# Altium PCB dc_cdi.PcbDoc (part 1 of 3)
Units mm, origin at the board's own origin, x right, y up, seen from the top; angles counter-clockwise.
Board outline 67 x 85 mm, 4 copper layers (Signal Top, Gnd, Power, Signal Bottom), stack 0.603 mm thick; 104 components, 72 nets, 386 pads, 139 vias.
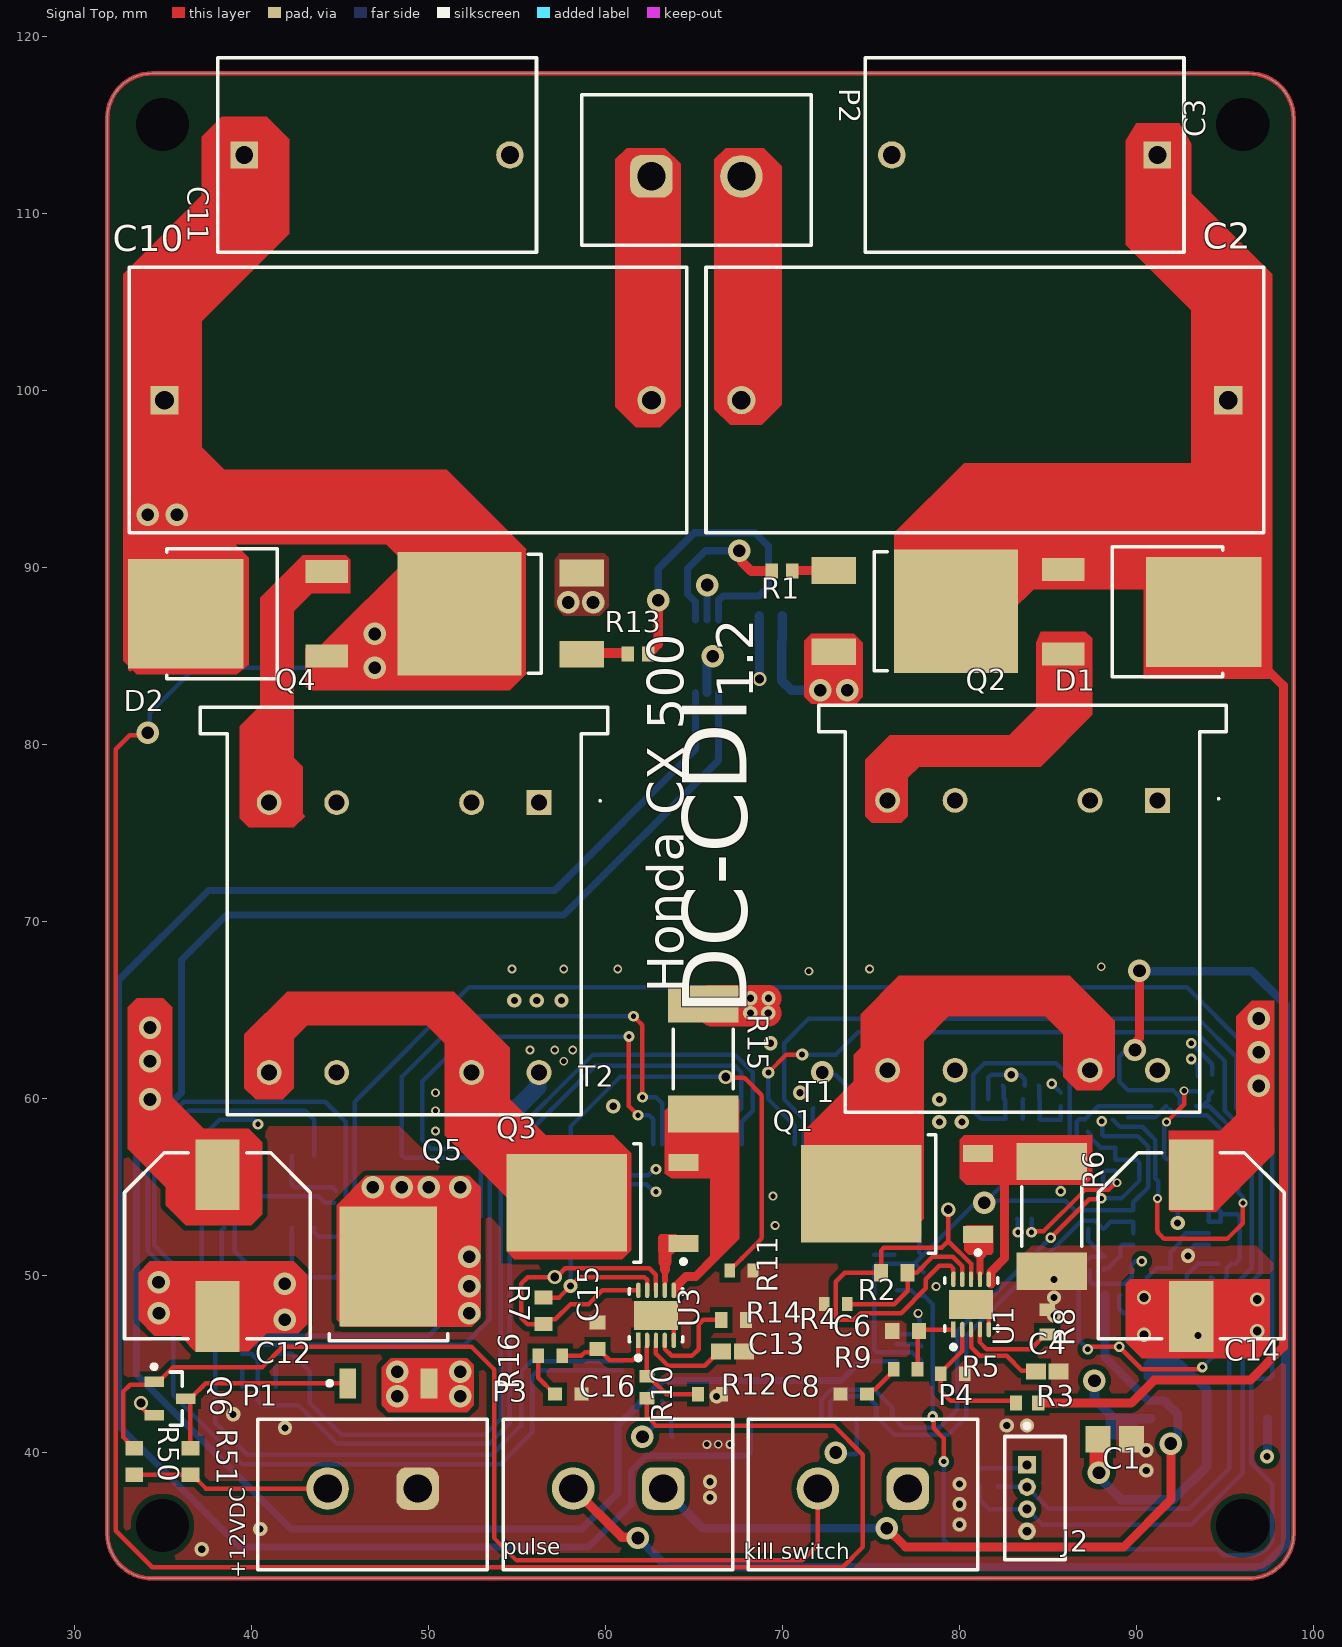
[diagram p0: Signal Top view]
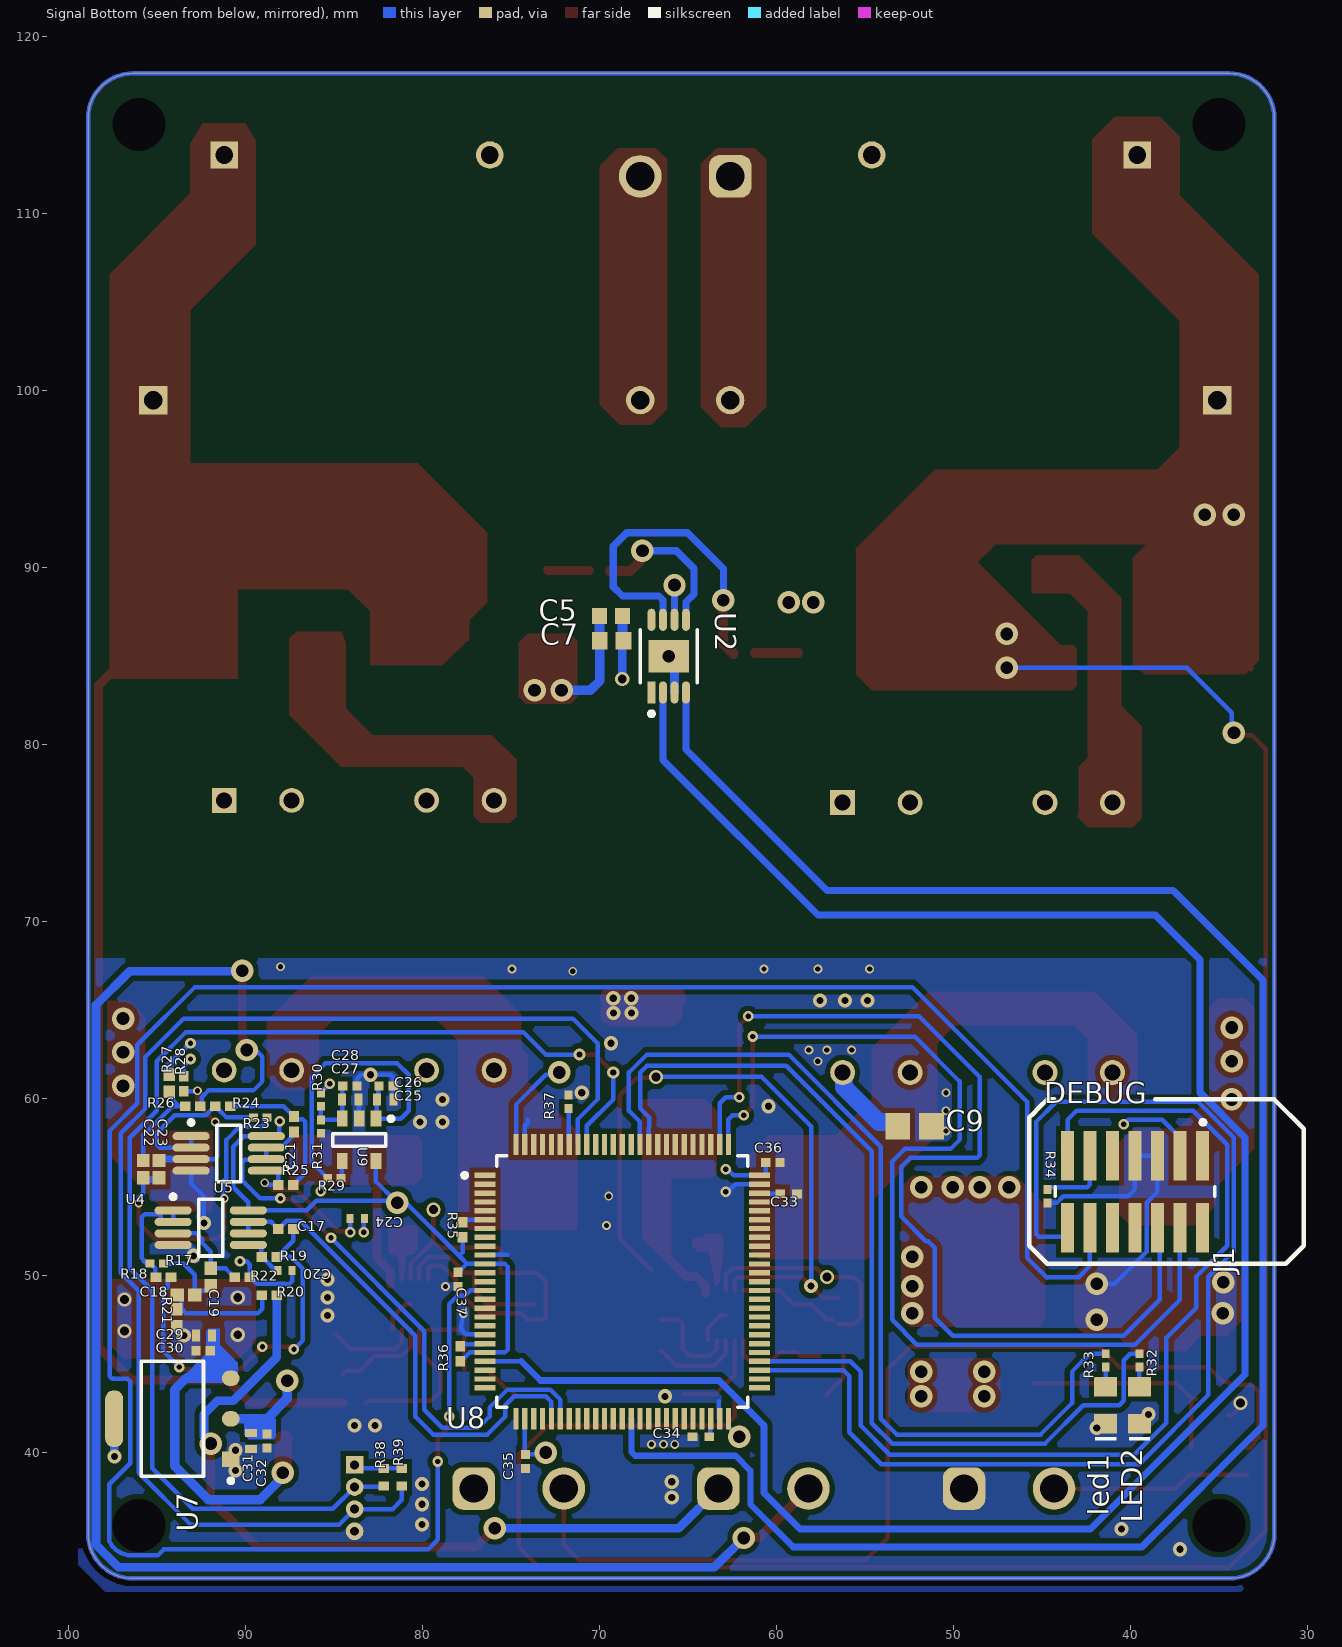
[diagram p1: Signal Bottom view, seen from below]
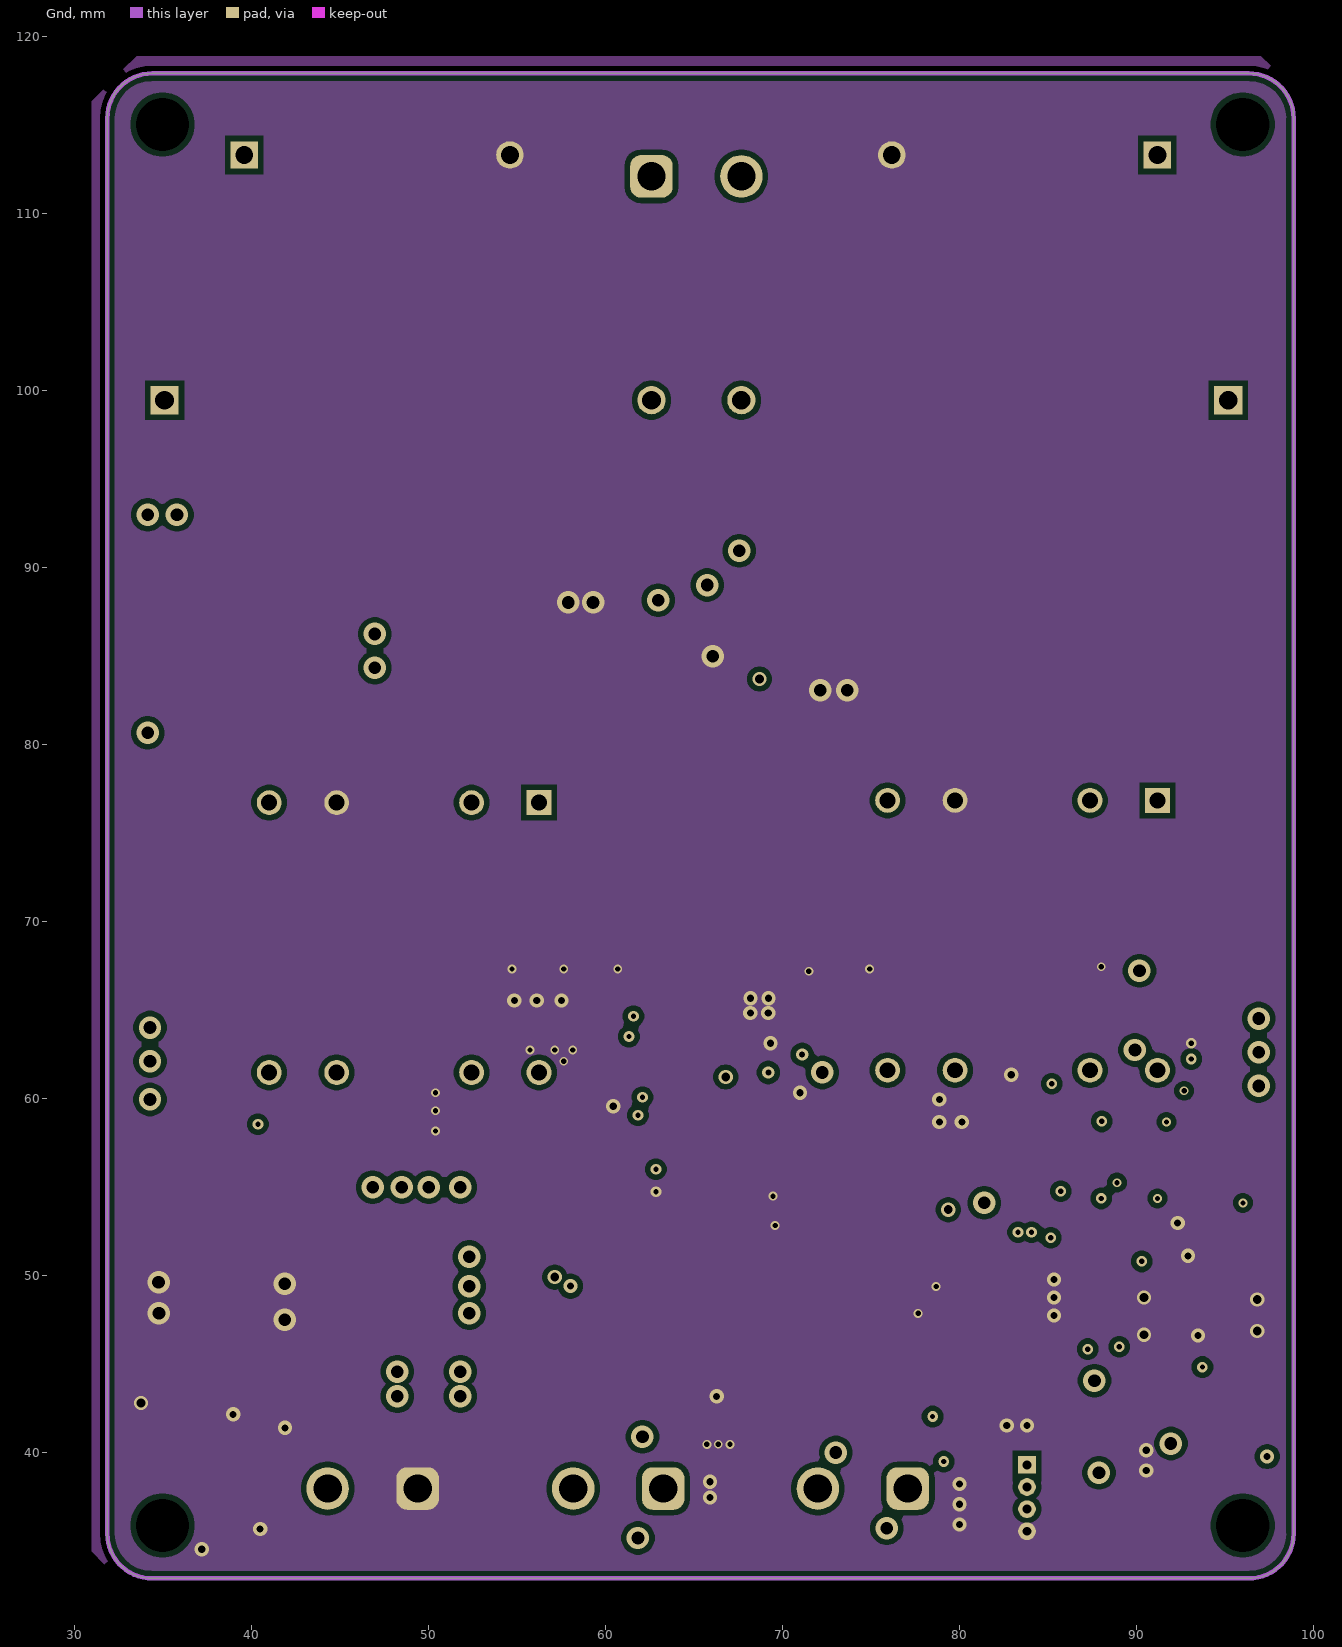
[diagram p2: Gnd]
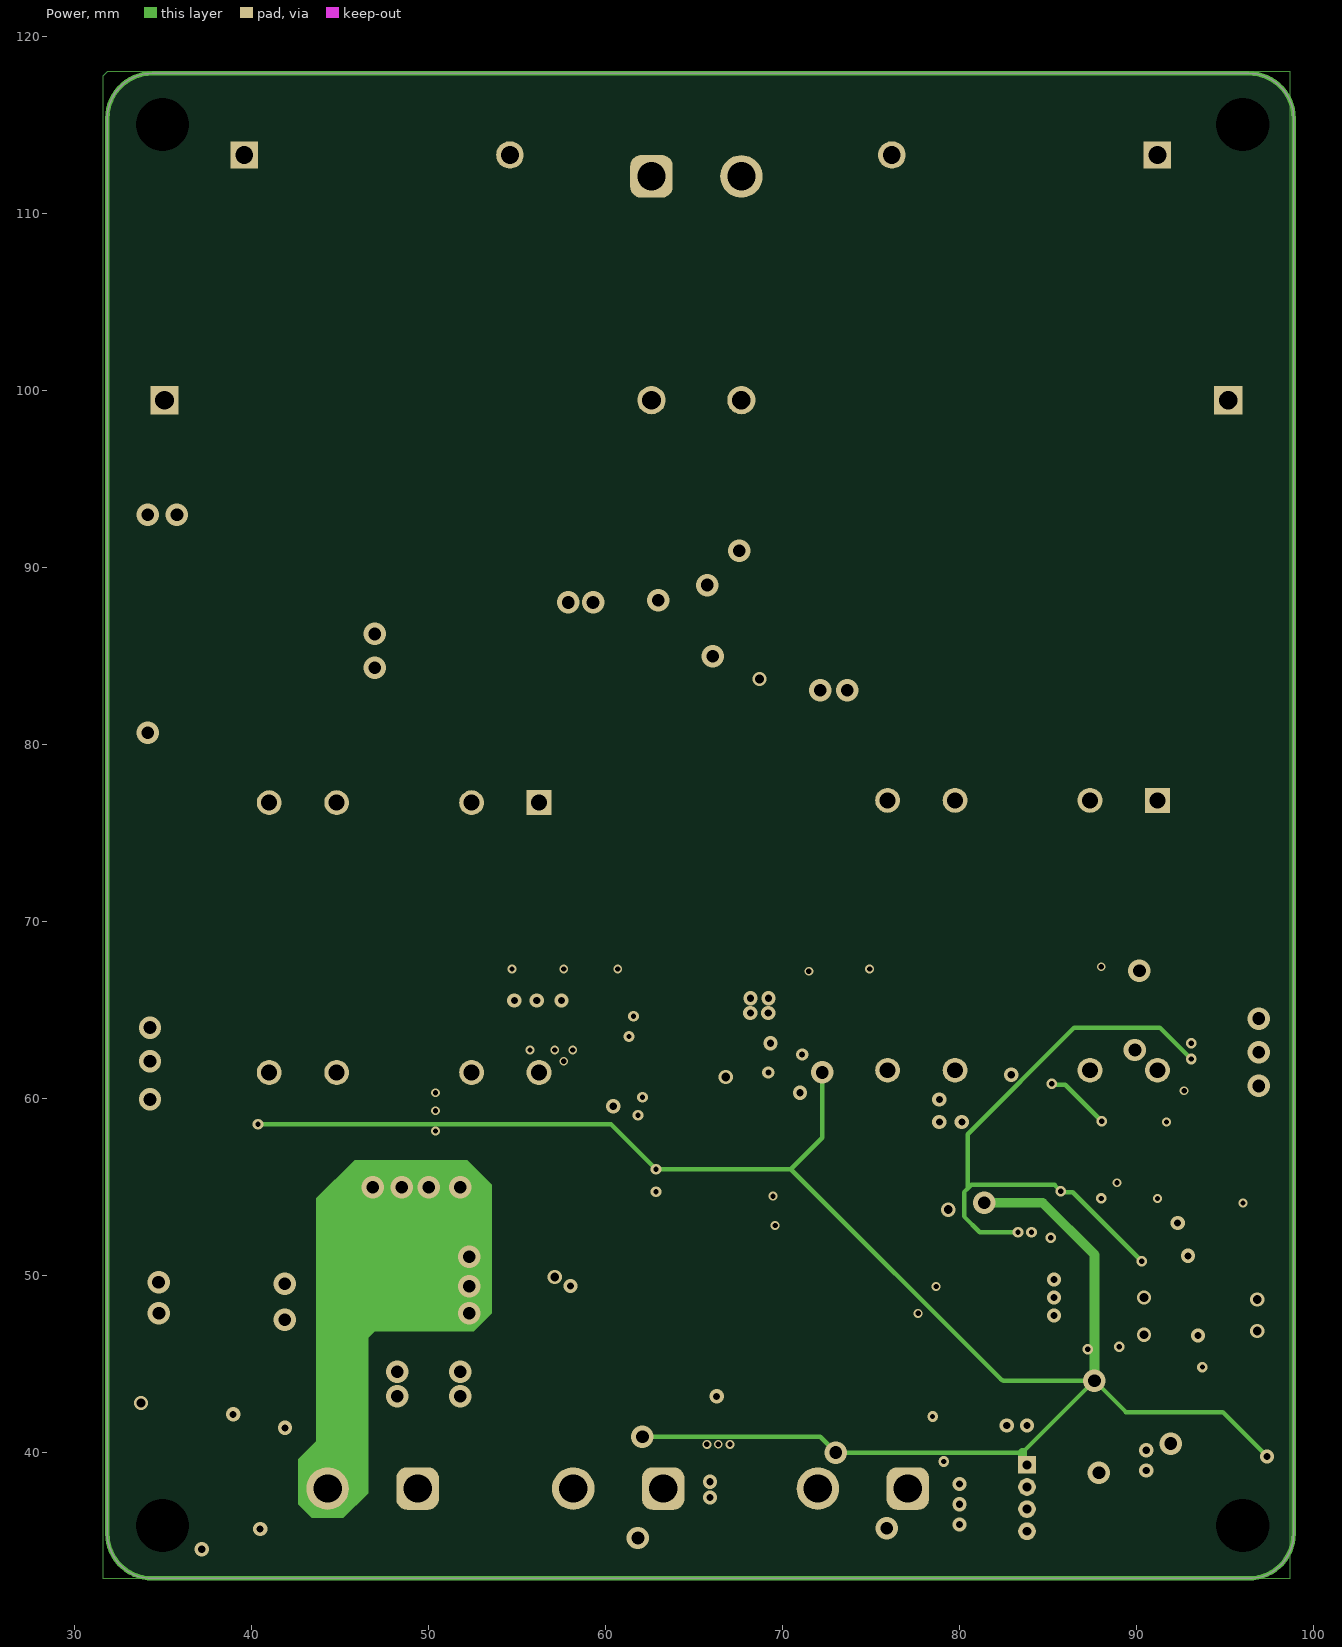
[diagram p3: Power]
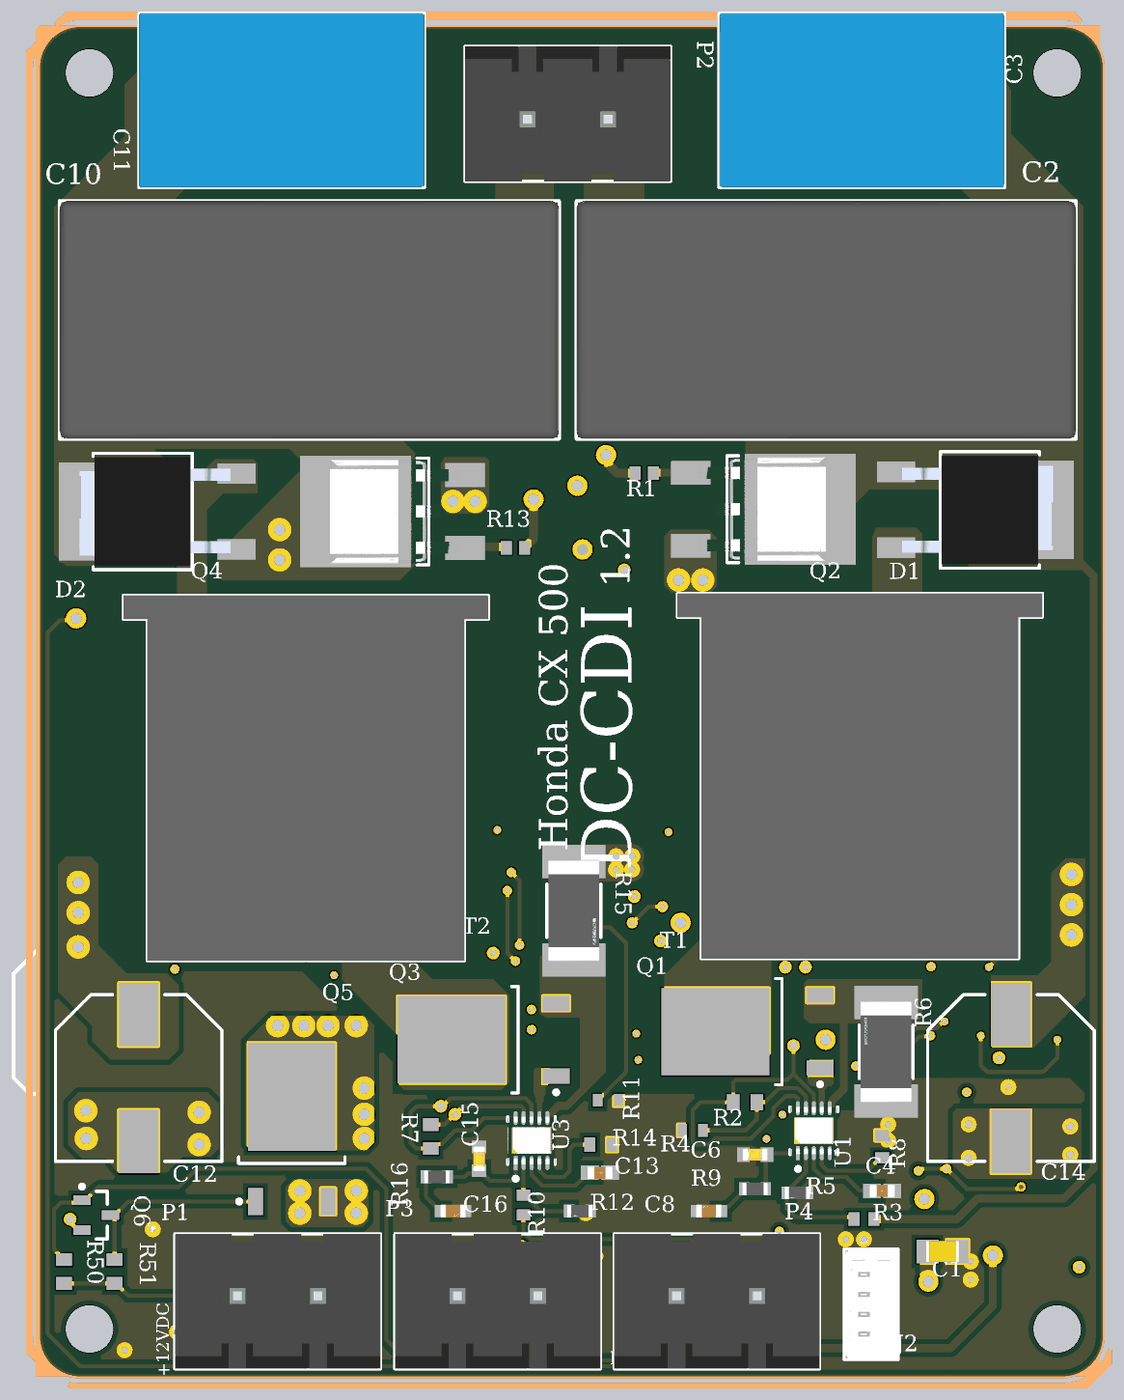
[diagram p5: 3D render of the assembled board from above, using the file's embedded part models]

## Layer stack, top to bottom
Top Solder: solder mask 0.0102, Solder Resist, Dk 3.5
Signal Top: signal copper 0.035
Dielectric 2: prepreg 0.0711, PP-006, Dk 4.1
Gnd: signal copper 0.0356
Dielectric 1: dielectric 0.32, FR-4, Dk 4.8
Power: signal copper 0.0356
Dielectric 3: prepreg 0.0711, PP-006, Dk 4.1
Signal Bottom: signal copper 0.035
Bottom Solder: solder mask 0.0102, Solder Resist, Dk 3.5

## Board outline
31.877,35.433 31.877,115.353 cw(c34.417,115.353) 34.417,117.893 96.337,117.893 cw(c96.337,115.353) 98.877,115.353 98.877,35.433 cw(c96.337,35.433) 96.337,32.893 34.417,32.893 cw(c34.417,35.433)

## Design rules (kind name [scope] priority, off if disabled: settings)
Clearance [All] p1: gap=0.3 ignorepadtopadclearanceinfootprint=FALSE
ComponentClearance [All] p1 off: gap=0 collisioncheckmode=3 verticalgap=0 showdistances=FALSE
Height [All] p1 off: minheight=0 maxheight=25.4 prefheight=12.7
PlaneClearance [All] p1: clearance=15
PolygonConnect [All] p1: connectstyle=Direct reliefconductorwidth=0.254 reliefentries=4 polygonreliefangle="90 Angle" airgapwidth=0.254
RoutingVias [All] p1: holewidth=0.711 width=1.27 viastyle="Through Hole" minholewidth=0.711 minwidth=1.27 maxholewidth=0.711 maxwidth=1.27
SolderMaskExpansion [All] p1: expansion=0.102 istentingtop=FALSE
SupplyNets "Schematic Supply Nets_5" [InNet('GND')] p1: voltage=0.000
SupplyNets "Schematic Supply Nets_4" [InNet('+12')] p2: voltage=0.000
SupplyNets "Schematic Supply Nets_3" [InNet('+3V3')] p3: voltage=0.000
SupplyNets "Schematic Supply Nets_2" [InNet('+12FIX')] p4: voltage=0.000
SupplyNets "Schematic Supply Nets_1" [InNet('VREF')] p5: voltage=0.000
Width [All] p1: maxlimit=0.254 minlimit=0.254 preferedwidth=0.254
27 further rules are at their usual default settings.

## Classes and differential pairs
component class power_side: C1 C2 C3 C4 C5 C6 C7 C8 C9 C10 C11 C13 C15 C16 D1 D2 Q1 Q2 Q3 Q4 R1 R2 R3 R4 R5 R6 R7 R8 R9 R10 R11 R12 R13 R14 R15 R16 T1 T2 U1 U2 U3
component class logic_000: C29 C30 C31 C32 C33 C34 C35 C37 J1 led1 LED2 R32 R33 R34 R35 R36 R37 R38 R39 U7 U8
component class input_output: C12 C14 J2 P1 P2 P3 P4 Q5 Q6 R50 R51
component class input_filter: C17 C18 C19 C20 C21 C22 C23 C24 C25 C26 C27 C28 R17 R18 R19 R20 R21 R22 R23 R24 R25 R26 R27 R28 R29 R30 R31 U4 U5 U9

## Components (designator, comment, footprint, x,y, rotation, side; value= is the part's Value field where it differs from the comment)
C1 "GRM21BR61C475KA88L" CAPC2013X135X45LL10T25 88.773,40.767 r180 top
C2 "BFC233820225" FP-BFC233820225-MFG 81.441,99.441 r180 top
C3 "B32672Z4105K000" FP-B32672Z4105K000-MFG 83.686,113.284 r180 top
C4 "C1608X5R1H105K080AB" FP-C1608-080-0_1-IPC_B 84.969,44.577 r180 top
C5 "06035C104KAT4A" CAPC1608X90X35LL15T15 69.342,87.259 r0 bottom
C6 "CC0603KRX7R9BB101" FP-CC0603-DA-MFG 76.962,46.863 r180 top value="100 pF"
C7 "C0603C475K8PACTU" CAPC1608X87X35NL15T15 69.302,85.852 r180 bottom
C8 "06035C103KAT2A" FP-0603-L_1_6_0_15-W_0_81-MFG 74.041,43.307 r180 top
C9 "GRM21BR61C475KA88L" CAPC2013X135X45LL10T25 52.197,58.42 r0 bottom
C10 "BFC233820225" FP-BFC233820225-MFG 48.861,99.441 r0 top
C11 "B32672Z4105K000" FP-B32672Z4105K000-MFG 47.117,113.284 r0 top
C12 "UUD1A102MNL1GS" NIC-CAPA2-10X10_V 38.1,51.689 r270 top
C13 "C1608X5R1H105K080AB" FP-C1608-080-0_1-IPC_B 67.183,45.72 r180 top
C14 "UUD1A102MNL1GS" NIC-CAPA2-10X10_V 93.091,51.689 r270 top
C15 "CC0603KRX7R9BB101" FP-CC0603-DA-MFG 59.563,46.597 r90 top value="100 pF"
C16 "06035C103KAT2A" FP-0603-L_1_6_0_15-W_0_81-MFG 57.912,43.307 r0 top
C17 "GRM1555C1H102JA01D" FP-GRM155-0_05-IPC_B 87.707,52.636 r180 bottom
C18 "GRM155R61A334KE15D" CAPC1005X55X25ML05T10 93.345,48.895 r180 bottom
C19 "GRM155R61A334KE15D" CAPC1005X55X25ML05T10 91.948,49.911 r90 bottom
C20 "GRM1555C1H331JA01D" FP-GRM155-0_05-MFG#1 87.757,50.292 r180 bottom
C21 "GRM1555C1H102JA01D" FP-GRM155-0_05-IPC_B 87.249,58.547 r90 bottom
C22 "GRM155R61A334KE15D" CAPC1005X55X25ML05T10 95.758,56.007 r270 bottom
C23 "GRM155R61A334KE15D" CAPC1005X55X25ML05T10 94.869,56.007 r90 bottom
C24 "GRM1555C1H331JA01D" FP-GRM155-0_05-MFG#1 83.674,53.213 r180 bottom
C25 "CL05A106MP5NUNC" FP-CL05A106MP5NUNC-MFG 82.087,59.944 r180 bottom value=10uF
C26 "C0402C104K8PACTU" FP-C0402-BB-MFG 82.042,60.706 r180 bottom value="0.10 μF"
C27 "CL05A106MP5NUNC" FP-CL05A106MP5NUNC-MFG 84.074,59.944 r180 bottom value=10uF
C28 "C0402C104K8PACTU" FP-C0402-BB-MFG 84.093,60.706 r180 bottom value="0.10 μF"
C29 "CL05A106MP5NUNC" FP-CL05A106MP5NUNC-MFG 92.329,46.609 r0 bottom value=10uF
C30 "C0402C104K8PACTU" FP-C0402-BB-MFG 92.38,45.749 r0 bottom value="0.10 μF"
C31 "CL05A106MP5NUNC" FP-CL05A106MP5NUNC-MFG 89.662,40.659 r270 bottom value=10uF
C32 "C0402C104K8PACTU" FP-C0402-BB-MFG 88.773,40.659 r270 bottom value="0.10 μF"
C33 "GRM155R61A225KE95D" FP-GRM155-0_05-MFG#2 59.309,54.61 r180 bottom
C34 "GRM155R61A225KE95D" FP-GRM155-0_05-MFG#2 64.262,40.894 r0 bottom
C35 "C0402C104K8PACTU" FP-C0402-BB-MFG 74.168,39.497 r270 bottom value="0.10 μF"
C36 "C0402C104K8PACTU" FP-C0402-BB-MFG 60.198,56.388 r180 bottom value="0.10 μF"
C37 "C0402C104K8PACTU" FP-C0402-BB-MFG 77.978,49.784 r270 bottom value="0.10 μF"
D1 "C3D03060E" FP-TO-252-2_v2-MFG 91.76,87.48 r270 top
D2 "C3D03060E" FP-TO-252-2_v2-MFG 38.354,87.376 r90 top
J1 "FTSH-107-01-L-DV-K" FP-FTSH-107-01-L-DV-K-MFG 39.751,54.74 r0 bottom
J2 "53047-0410" FP-53047-0410-MFG 84.27,37.435 r90 top
led1 "150080SS75000" WL-SMCW_0805_150080xx75000 41.402,42.672 r90 bottom (schematic designator D4)
LED2 "150080SS75000" WL-SMCW_0805_150080xx75000 39.497,42.672 r90 bottom (schematic designator D3)
P1 "691701510002B" 691701510002B 46.863,37.623 r180 top
P2 "691701510002B" 691701510002B 65.151,112.426 r0 top
P3 "691701510002B" 691701510002B 60.731,37.623 r180 top
P4 "691701510002B" 691701510002B 74.549,37.623 r180 top
Q1 "IPD600N25N3" INF-PG-TO252-3-11_A_L 76.454,54.61 r180 top
Q2 "IPD600N25N3" FP-PG-TO252-3-MFG 77.473,87.517 r270 top
Q3 "IPD600N25N3" INF-PG-TO252-3-11_A_L 59.817,54.102 r180 top
Q4 "IPD600N25N3" FP-PG-TO252-3-MFG 54.102,87.376 r90 top
Q5 "IPD600N25N3" INF-PG-TO252-3-11_A_L 47.752,48.514 r90 top
Q6 "PMV56XN,215" NXP-SOT23_L 35.422,43.053 r0 top
R1 "CRCW060347R0FKEA" RESC1609X50X30LL10T20 69.977,89.789 r0 top
R2 "RC0603FR-07470KL" RESC1608X55X25ML10T15 76.327,50.165 r180 top
R3 "ERJ-3EKF1243V" RESC1608X55X30LL15T15 83.82,42.799 r0 top
R4 "RC0603FR-0756KL" RESC1608X55X25LL10T15 73.025,48.387 r0 top
R5 "RC0603FR-071KL" FP-RC0603-0_55-IPC_C 79.629,44.45 r180 top
R6 "CRA2512-FZ-R020ELF" FP-CRA2512-MFG 85.217,53.34 r90 top
R7 "RC0603FR-07470KL" RESC1608X55X25ML10T15 56.515,48.006 r270 top
R8 "RC0603FR-07120KL" RESC1608X55X25NL10T15 84.963,47.371 r270 top
R9 "RC0603FR-0710KL" FP-RC0603-0_55-IPC_C 76.962,44.704 r0 top
R10 "ERJ-3EKF1243V" RESC1608X55X30LL15T15 62.357,43.688 r270 top
R11 "RC0603FR-0756KL" RESC1608X55X25LL10T15 67.691,50.292 r180 top
R12 "RC0603FR-071KL" FP-RC0603-0_55-IPC_C 65.913,43.307 r180 top
R13 "CRCW060347R0FKEA" RESC1609X50X30LL10T20 61.849,85.09 r180 top
R14 "RC0603FR-07120KL" RESC1608X55X25NL10T15 67.248,47.498 r180 top
R15 "CRA2512-FZ-R020ELF" FP-CRA2512-MFG 65.532,62.23 r270 top
R16 "RC0603FR-0710KL" FP-RC0603-0_55-IPC_C 56.896,45.466 r0 top
R17 "RC0402FR-07560KL" RESC1005X40X25LL05T10 94.996,50.673 r0 bottom
R18 "RC0402FR-0722KL" RESC1005X40X25NL05T10 94.615,49.911 r180 bottom
R19 "RC0402FR-0722KL" RESC1005X40X25NL05T10 88.646,51.054 r0 bottom
R20 "RC0402FR-0722KL" RESC1005X40X25NL05T10 88.646,48.895 r0 bottom
R21 "RC0402FR-072M2L" RESC1005X40X25ML05T10 93.853,47.625 r90 bottom
R22 "RC0402FR-071M5L" RESC1005X40X25NL05T10 90.17,49.911 r0 bottom
R23 "RC0402FR-07560KL" RESC1005X40X25LL05T10 89.154,58.928 r0 bottom
R24 "RC0402FR-0722KL" RESC1005X40X25NL05T10 91.269,59.563 r180 bottom
R25 "RC0402FR-0722KL" RESC1005X40X25NL05T10 87.713,55.118 r0 bottom
R26 "RC0402FR-0722KL" RESC1005X40X25NL05T10 92.964,59.563 r0 bottom
R27 "RC0402FR-072M2L" RESC1005X40X25ML05T10 94.277,60.855 r270 bottom
R28 "RC0402FR-071M5L" RESC1005X40X25NL05T10 93.472,60.833 r270 bottom
R29 "RC0402FR-0710KL" RESC1005X40X25LL05T10 84.963,55.499 r180 bottom
R30 "RC0402FR-0710KL" RESC1005X40X25LL05T10 85.725,59.938 r270 bottom
R31 "RC0402FR-0710KL" RESC1005X40X25LL05T10 85.725,58.414 r270 bottom
R32 "RC0402FR-07510RL" RESC1005X40X25LL05T10 39.497,45.212 r90 bottom
R33 "RC0402FR-07510RL" RESC1005X40X25LL05T10 41.402,45.212 r90 bottom
R34 "RC0402FR-0710KL" RESC1005X40X25LL05T10 44.704,54.477 r90 bottom
R35 "RC0402JR-070RL" RESC1005X40X25NL05T10 77.724,52.578 r90 bottom
R36 "RC0402JR-070RL" RESC1005X40X25NL05T10 77.851,45.593 r90 bottom
R37 "RC0402FR-0710KL" RESC1005X40X25LL05T10 71.755,59.817 r270 bottom
R38 "RC0402JR-074K7L" FP-RC0402-0_4-MFG 82.169,38.608 r90 bottom
R39 "RC0402JR-074K7L" FP-RC0402-0_4-MFG 81.153,38.608 r90 bottom
R50 "RC0603FR-07470KL" RESC1608X55X25ML10T15 33.401,39.497 r270 top
R51 "RC0603FR-07470KL" RESC1608X55X25ML10T15 36.576,39.497 r270 top
T1 "74080" 74080 91.186,76.835 r270 top
T2 "74080" 74080 56.261,76.708 r270 top
U1 "LT3758EDD#PBF" FP-DD-10-05-08-1699-IPC_B 80.661,48.368 r90 top
U2 "ADP3654ARHZ-RL" FP-RH-8-1-IPC_C 66.081,84.982 r90 bottom
U3 "LT3758EDD#PBF" FP-DD-10-05-08-1699-IPC_B 62.865,47.752 r90 top
U4 "AD8602DRM-REEL" ADI-RM-8_M 91.948,52.705 r180 bottom
U5 "AD8602DRM-REEL" ADI-RM-8_M 90.932,56.896 r180 bottom
U7 "AMS1117-3.3" FP-AMS1117-IPC_C 94.107,41.91 r0 bottom
U8 "STM32H750VBT6" FP-LQFP100-1L-MFG 68.707,49.657 r180 bottom
U9 "AD8031ARTZ-REEL7" ADI-RJ-5_L 83.566,57.658 r270 bottom

## Footprints (in the part's own frame and the unit in brackets; to place one, negate y for a bottom-side part, rotate by r counter-clockwise, add the part's x,y. Pads: shape width x height; smd on the part's side, far side on the other; paste and mask are expansions set on the pad)
74080 [mm]
  rect 1.4x1.4 hole 0.9: 1(0,0)
  round 1.4 hole 0.9: 2(0,-3.81) 4(0,-11.43) 5(0,-15.24) 6(15.24,-15.24) 7(15.24,-11.43) 9(15.24,-3.81) 10(15.24,0)
  silkscreen extent -5.38,-19.12 17.62,3.88, body extent -5.38,-19.12 17.62,3.88, height 18.1
691701510002B [mm] "THR - 5,08mm - PCB Vertical Close - 02p"
  rrect50% 2.4x2.4 hole 1.6: 1(-2.54,-0.35)
  round 2.4 hole 1.6: 2(2.54,-0.35)
  silkscreen extent -6.48,-4.25 6.48,4.25, body extent -6.48,-4.25 6.48,4.25, height 12.1
ADI-RJ-5_L [mm] "SOT-23, 5-Leads, Body 2.9x1.6mm, Pitch 0.95mm, IPC High Density"
  rect 0.9x0.6 smd: 1(-1.2,0.95) 2(-1.2,0) 3(-1.2,-0.95) 4(1.2,-0.95) 5(1.2,0.95)
  silkscreen extent -1.32,-1.5 0.35,1.92, body extent -0.85,-1.5 0.85,1.5, height 1.45
ADI-RM-8_M [mm] "SOP, 8-Leads, Body 3x3mm, Pitch 0.65mm, IPC Low Density"
  oval 2.1x0.45 smd: 1(-2.125,0.975) 2(-2.125,0.325) 3(-2.125,-0.325) 4(-2.125,-0.975) 5(2.125,-0.975) 6(2.125,-0.325) 7(2.125,0.325) 8(2.125,0.975)
  silkscreen extent -2.25,-1.6 0.67,1.87, body extent -1.6,-1.6 1.6,1.6, height 1.1
CAPC1005X55X25ML05T10 [mm] "Chip Capacitor, 2-Leads, Body 1.00x0.50mm, IPC Low Density"
  rect 0.76x0.72 smd: 1(-0.49,0) 2(0.49,0)
  body extent -0.53,-0.28 0.53,0.27, height 0.55
CAPC1608X87X35NL15T15 [mm] "Chip Capacitor, 2-Leads, Body 1.60x0.80mm, IPC Medium Density"
  rect 0.9x1 smd: 1(-0.675,0) 2(0.675,0)
  body extent -0.87,-0.48 0.87,0.47, height 0.87
CAPC1608X90X35LL15T15 [mm] "Chip Capacitor, 2-Leads, Body 1.60x0.81mm, IPC High Density"
  rect 0.85x0.9 smd: 1(-0.65,0) 2(0.65,0)
  body extent -0.88,-0.48 0.87,0.48, height 0.9
CAPC2013X135X45LL10T25 [mm] "Chip Capacitor, 2-Leads, Body 2.10x1.35mm, IPC High Density"
  rect 1.4x1.5 smd: 1(-0.95,0) 2(0.95,0)
  body extent -1.05,-0.67 1.05,0.67, height 1.35
FP-0603-L_1_6_0_15-W_0_81-MFG [mm]
  rect 0.8x0.75 smd paste+0 mask+0: 1(-0.75,0) 2(0.75,0)
  body extent -1.25,-0.58 1.25,0.58, height 0.25
FP-53047-0410-MFG [mm]
  rect 1x1 hole 0.5 paste-2539.97 mask+0: 1(1.875,0.45)
  round 1 hole 0.5 paste-2539.97 mask+0: 2(0.625,0.45) 3(-0.625,0.45) 4(-1.875,0.45)
  silkscreen extent -3.47,-1.7 4.2,1.7, body extent -3.57,-1.8 3.57,1.8, height 0.25
FP-AMS1117-IPC_C [mm]
  rect 1.004x0.872 smd paste+0 mask+0: 1(-3.295,2.29)
  rrect100% 1.004x0.872 smd paste+0 mask+0: 2(-3.295,0) 3(-3.295,-2.29)
  rrect87% 1.004x3.182 smd paste+0 mask+0: 4(3.295,0)
  silkscreen extent -3.42,-3.25 1.75,3.62, body extent -3.53,-3.25 3.53,3.25, height 1.8
FP-B32672Z4105K000-MFG [mm]
  rect 1.55x1.55 hole 1 paste-2539.97 mask+0: 1(-7.5,0)
  round 1.55 hole 1 paste-2539.97 mask+0: 2(7.5,0)
  silkscreen extent -9,-5.5 9,5.5, body extent -9.1,-5.6 9.1,5.6, height 0.25
FP-BFC233820225-MFG [mm]
  rect 1.6x1.6 hole 1.05 paste-2539.97 mask+0: 1(-13.75,0)
  round 1.6 hole 1.05 paste-2539.97 mask+0: 2(13.75,0)
  silkscreen extent -15.75,-7.5 15.75,7.5, body extent -15.85,-7.6 15.85,7.6, height 0.25
FP-C0402-BB-MFG [mm]
  rect 0.52x0.52 smd paste+0 mask+0: 1(-0.4,0) 2(0.4,0)
  body extent -0.5,-0.25 0.5,0.25, height 0.55
FP-C1608-080-0_1-IPC_B [mm]
  rect 1.131x0.912 smd paste+0 mask+0: 1(-0.641,0) 2(0.641,0)
  body extent -1.46,-0.71 1.46,0.71, height 0.25
FP-CC0603-DA-MFG [mm]
  rect 0.8x0.9 smd paste+0 mask+0: 1(-0.75,0) 2(0.75,0)
  body extent -1.35,-0.75 1.35,0.75, height 0.25
FP-CL05A106MP5NUNC-MFG [mm]
  rect 0.45x0.675 smd paste+0 mask+0: 1(-0.463,0) 2(0.463,0)
  body extent -0.5,-0.25 0.5,0.25, height 0.7
FP-CRA2512-MFG [mm]
  rect 2.1x4 smd paste+0 mask+0: 1(-3.1,0) 2(3.1,0)
  silkscreen extent -1.68,-1.7 1.68,1.7, body extent -4.25,-2.1 4.25,2.1, height 0.25
FP-DD-10-05-08-1699-IPC_B [mm]
  rect 0.881x0.242 smd paste+0 mask+0: 1(-1.416,1)
  rrect100% 0.881x0.242 smd paste+0 mask+0: 2(-1.416,0.5) 3(-1.416,0) 4(-1.416,-0.5) 5(-1.416,-1) 6(1.416,-1) 7(1.416,-0.5) 8(1.416,0) 9(1.416,0.5) 10(1.416,1)
  rect 1.65x2.48 smd paste-1000 mask+0: 11(0,0)
  silkscreen extent -2.53,-1.5 1.5,1.5, body extent -2.11,-1.75 2.11,1.75, height 0.25
FP-FTSH-107-01-L-DV-K-MFG [mm]
  rect 0.74x2.79 smd paste+0 mask+0: 1(-3.81,-2.035) 2(-3.81,2.035) 3(-2.54,-2.035) 4(-2.54,2.035) 5(-1.27,-2.035) 6(-1.27,2.035) 7(0,-2.035) 8(0,2.035) 9(1.27,-2.035) 10(1.27,2.035) 11(2.54,-2.035) 12(2.54,2.035) 13(3.81,-2.035) 14(3.81,2.035)
  silkscreen extent -4.51,-4.04 4.51,0.27, body extent -4.44,-2.92 4.44,2.92, height 6.25
FP-GRM155-0_05-IPC_B [mm]
  rect 0.615x0.572 smd paste+0 mask+0: 1(-0.429,0) 2(0.429,0)
  body extent -0.5,-0.25 0.5,0.25, height 0.55
FP-GRM155-0_05-MFG#1 [mm]
  rect 0.4x0.5 smd paste+0 mask+0: 1(-0.4,0) 2(0.4,0)
  body extent -0.5,-0.25 0.5,0.25, height 0.55
FP-GRM155-0_05-MFG#2 [mm]
  rect 0.55x0.5 smd paste+0 mask+0: 1(-0.475,0) 2(0.475,0)
  body extent -0.5,-0.25 0.5,0.25, height 0.55
FP-LQFP100-1L-MFG [mm]
  rect 1.2x0.3 smd paste+0 mask+0: 1(-7.75,6) 2(-7.75,5.5) 3(-7.75,5) 4(-7.75,4.5) 5(-7.75,4) 6(-7.75,3.5) 7(-7.75,3) 8(-7.75,2.5) 9(-7.75,2) 10(-7.75,1.5) 11(-7.75,1) 12(-7.75,0.5) 13(-7.75,0) 14(-7.75,-0.5) 15(-7.75,-1) 16(-7.75,-1.5) 17(-7.75,-2) 18(-7.75,-2.5) 19(-7.75,-3) 20(-7.75,-3.5) 21(-7.75,-4) 22(-7.75,-4.5) 23(-7.75,-5) 24(-7.75,-5.5) 25(-7.75,-6) 51(7.75,-6) 52(7.75,-5.5) 53(7.75,-5) 54(7.75,-4.5) 55(7.75,-4) 56(7.75,-3.5) 57(7.75,-3) 58(7.75,-2.5) 59(7.75,-2) 60(7.75,-1.5) 61(7.75,-1) 62(7.75,-0.5) 63(7.75,0) 64(7.75,0.5) 65(7.75,1) 66(7.75,1.5) 67(7.75,2) 68(7.75,2.5) 69(7.75,3) 70(7.75,3.5) 71(7.75,4) 72(7.75,4.5) 73(7.75,5) 74(7.75,5.5) 75(7.75,6)
  rect 0.3x1.2 smd paste+0 mask+0: 26(-6,-7.75) 27(-5.5,-7.75) 28(-5,-7.75) 29(-4.5,-7.75) 30(-4,-7.75) 31(-3.5,-7.75) 32(-3,-7.75) 33(-2.5,-7.75) 34(-2,-7.75) 35(-1.5,-7.75) 36(-1,-7.75) 37(-0.5,-7.75) 38(0,-7.75) 39(0.5,-7.75) 40(1,-7.75) 41(1.5,-7.75) 42(2,-7.75) 43(2.5,-7.75) 44(3,-7.75) 45(3.5,-7.75) 46(4,-7.75) 47(4.5,-7.75) 48(5,-7.75) 49(5.5,-7.75) 50(6,-7.75) 76(6,7.75) 77(5.5,7.75) 78(5,7.75) 79(4.5,7.75) 80(4,7.75) 81(3.5,7.75) 82(3,7.75) 83(2.5,7.75) 84(2,7.75) 85(1.5,7.75) 86(1,7.75) 87(0.5,7.75) 88(0,7.75) 89(-0.5,7.75) 90(-1,7.75) 91(-1.5,7.75) 92(-2,7.75) 93(-2.5,7.75) 94(-3,7.75) 95(-3.5,7.75) 96(-4,7.75) 97(-4.5,7.75) 98(-5,7.75) 99(-5.5,7.75) 100(-6,7.75)
  silkscreen extent -9.03,-7.1 7.1,7.1, body extent -8,-8 8,8, height 1.6
FP-PG-TO252-3-MFG [mm]
  rect 1.5x2.5 smd paste+0 mask+0: 1(-2.3,-4.575) 3(2.3,-4.575)
  rect 7x7 smd paste+0 mask+0: 4(0,2.325)
  silkscreen extent -3.36,-2.28 3.36,-1.55, body extent -3.6,-5.92 3.6,5.92, height 0.25
FP-RC0402-0_4-MFG [mm]
  rect 0.5x0.6 smd paste+0 mask+0: 1(-0.5,0) 2(0.5,0)
  body extent -0.5,-0.25 0.5,0.25, height 0.4
FP-RC0603-0_55-IPC_C [mm]
  rect 0.659x0.812 smd paste+0 mask+0: 1(-0.677,0) 2(0.677,0)
  body extent -1.11,-0.55 1.11,0.55, height 0.25
FP-RH-8-1-IPC_C [mm]
  rect 1.257x0.436 smd paste+0 mask+0: 1(-2.051,0.975)
  rrect100% 1.257x0.436 smd paste+0 mask+0: 2(-2.051,0.325) 3(-2.051,-0.325) 4(-2.051,-0.975) 5(2.051,-0.975) 6(2.051,-0.325) 7(2.051,0.325) 8(2.051,0.975)
  rect 1.83x2.26 smd paste-1000 mask+0: 9(0,0)
  silkscreen extent -3.38,-1.6 1.5,1.6, body extent -2.46,-1.5 2.46,1.5, height 1.1
FP-TO-252-2_v2-MFG [mm]
  rect 1.3x2.4 smd paste+0 mask+0: 1(-2.39,-5.908) 2(2.39,-5.908)
  rect 6.2x6.5 smd paste+0 mask+0: 3(0,2.042)
  silkscreen extent -3.67,-3.12 3.67,3.12, body extent -3.77,-7.21 3.77,5.39, height 0.25
INF-PG-TO252-3-11_A_L [mm] "DPAK, 3-Leads, Body 6.57x6.1mm, Pitch 2.29mm, IPC High Density"
  rect 1.7x0.95 smd: 1(-4.6,2.29) 3(-4.6,-2.29)
  rect 6.8x5.5 smd: 2(2,0)
  silkscreen extent -4.72,-3.35 -1.8,3.44, body extent -2.2,-3.37 4.02,3.37, height 2.41
NIC-CAPA2-10X10_V [mm] "Aluminum Electrolytic Capacitor, Diameter 10mm, Height 10.8mm, Pitch 8mm"
  rect 4x2.5 smd: 1(-4,0) 2(4,0)
  silkscreen extent -5.25,-5.25 5.25,5.25, body extent -4.96,-4.99 5,4.99, height 10.8
NXP-SOT23_L [mm] "SOT23, 3-Leads, Body 3x1.4mm, Pitch 0.95mm, IPC High Density"
  rect 1.1x0.6 smd: 1(-0.9,0.95) 2(-0.9,-0.95) 3(0.9,0)
  silkscreen extent -1.02,-1.5 0.7,1.92, body extent -0.7,-1.5 0.7,1.5, height 1.1
RESC1005X40X25LL05T10 [mm] "Chip Resistor, 2-Leads, Body 1.00x0.50mm, IPC High Density"
  rect 0.5x0.45 smd: 1(-0.375,0) 2(0.375,0)
  body extent -0.53,-0.27 0.53,0.28, height 0.4
RESC1005X40X25ML05T10 [mm] "Chip Resistor, 2-Leads, Body 1.00x0.50mm, IPC Low Density"
  rect 0.7x0.65 smd: 1(-0.475,0) 2(0.475,0)
  body extent -0.53,-0.27 0.53,0.28, height 0.4
RESC1005X40X25NL05T10 [mm] "Chip Resistor, 2-Leads, Body 1.00x0.50mm, IPC Medium Density"
  rect 0.6x0.55 smd: 1(-0.425,0) 2(0.425,0)
  body extent -0.53,-0.27 0.53,0.28, height 0.4
RESC1608X55X25LL10T15 [mm] "Chip Resistor, 2-Leads, Body 1.60x0.80mm, IPC High Density"
  rect 0.6x0.8 smd: 1(-0.65,0) 2(0.65,0)
  body extent -0.85,-0.45 0.85,0.45, height 0.55
RESC1608X55X25ML10T15 [mm] "Chip Resistor, 2-Leads, Body 1.70x0.90mm, IPC Low Density"
  rect 0.8x1 smd: 1(-0.75,0) 2(0.75,0)
  body extent -0.85,-0.45 0.85,0.45, height 0.55
RESC1608X55X25NL10T15 [mm] "Chip Resistor, 2-Leads, Body 1.70x0.90mm, IPC Medium Density"
  rect 0.7x0.9 smd: 1(-0.7,0) 2(0.7,0)
  body extent -0.85,-0.45 0.85,0.45, height 0.55
RESC1608X55X30LL15T15 [mm] "Chip Resistor, 2-Leads, Body 1.60x0.80mm, IPC High Density"
  rect 0.7x0.85 smd: 1(-0.625,0) 2(0.625,0)
  body extent -0.87,-0.48 0.87,0.48, height 0.55
RESC1609X50X30LL10T20 [mm] "Chip Resistor, 2-Leads, Body 1.55x0.85mm, IPC High Density"
  rect 0.7x0.85 smd: 1(-0.575,0) 2(0.575,0)
  body extent -0.82,-0.48 0.82,0.48, height 0.5
WL-SMCW_0805_150080xx75000 [mm] "SMD Mono-color Chip LED, body 2.0x1.25mm"
  rect 1.1x1.3 smd: 1(-1.05,0) 2(1.05,0)
  silkscreen extent -2,-0.6 -1.8,0.6, body extent -1,-0.63 1,0.62, height 0.7

## Part data
C1 C9: library part CMP-1662-00015-2, "Chip Capacitor, 4.7 uF, +/- 10%, 16 V, -55 to 85 degC, 0805 (2012 Metric), RoHS, Tape and Reel", Capacitance="4.7 uF", Case Code (Imperial)=0805, Case Code (Metric)=2012, Max Operating Temperature="85 degC", Min Operating Temperature="-55 degC", Package Quantity=3000, Tolerance=10%, Type (Capacitors)=X5R, Voltage Rating="16 V", Case\/Package=0805, ComponentLink1Description="Manufacturer URL", ComponentLink1URL=http://www.murata.com/, ComponentLink2Description=Datasheet, ComponentLink2URL=http://search.murata.co.jp/Ceramy/image/img/A01X/G101/ENG/GRM21BR61C475KA88-01.pdf, DatasheetVersion=03/2016, Height="1.25 mm", Length="2 mm", Mount="Surface Mount", Mounting Technology="Surface Mount", PackageDescription="2-Pin Surface Mount Device, Body 2 x 1.25 mm", PackageReference=0805, Packaging="Tape and Reel", PartNumber=GRM21BR61C475KA88L, Pins=2, Radiation Hardening=No, REACH SVHC="No SVHC", RoHSCompliant=true, Voltage Rating (DC)="16 V", Width="1.25 mm"
C2 C10: library part CMP-00030-39758189-1, "BFC233820225 Film Capacitor, Polypropylene, 800V, 20% +Tol, 20% -Tol, 0.22uF, Through Hole Mount", Capacitance=2.2µF, Case/Package=Radial, Dielectric=PP, Insulation Resistance=11GΩ, Max Operating Temperature=110°C, Min Operating Temperature=-55°C, Tolerance=20%, Voltage Rating=630V, Voltage Rating (AC)=310V, Contact Plating=Tin, Depth=15mm, Diameter=18mm, Dielectric Material=PP, Height=28mm, Height - Seated (Max)=24.9936mm, Lead Diameter=800µm, Lead Free="Lead Free", Lead Pitch=27.5mm, Length=31.5mm, Mount="Through Hole", NexarPartId=39758189, Number of Pins=2, Packaging=Bulk, Radiation Hardening=No, REACH SVHC=Unknown, RoHS=Compliant, Schedule B="8532250020, 8532250020", Termination=Radial, Voltage Rating (DC)=630V, Width=15.0114mm
C3 C11: library part CMP-00131-19048049-1, "B32672Z4105K000 Film Capacitor, Polypropylene, 450V, 10% +Tol, 10% -Tol, 1uF, Through Hole Mount, 7143", Capacitance=1µF, Case/Package=Radial, Dielectric=PP, Dielectric Material=Polypropylene, Max Operating Temperature=125°C, Min Operating Temperature=-55°C, Tolerance=10%, Voltage Rating=450V, Voltage Rating (AC)=220V, Depth=11mm, Features="General Purpose", Height=18.5mm, Height - Seated (Max)=18.4912mm, Lead Diameter=800µm, Lead Pitch=15mm, Length=18mm, Lifecycle Status=Production, Max Length=18mm, Max Width=11mm, Mount="Through Hole", NexarPartId=19048049, Packaging=Bulk, Radiation Hardening=No, REACH SVHC="No SVHC", RoHS=Compliant, Termination="PC Pins", Voltage Rating (DC)=450V, Width=10.9982mm
C4 C13: library part CMP-2000-06025-2, "Multilayer Ceramic Capacitors 1μF ±10% 50V X5R SMD 0603", Capacitance=1uF, Case Code (Imperial)=0603, Case Code (Metric)=1608, Dielectric=X5R, Dielectric Material=Ceramic, Max Operating Temperature=85°C, Min Operating Temperature=-55°C, Package Quantity=1, Tolerance=10%, Voltage=50V, Case/Package=0603, Construction=Flat, Depth=0.8mm, Height=0.8mm, Lead Free="Lead Free", Length=1.6mm, Mount="Surface Mount", Number of Pins=2, Packaging="Tape and Reel", Radiation Hardening=No, REACH SVHC="No SVHC", Resistor Type=Ceramic, RoHS Compliant=Yes, Series=C, Termination=SMD/SMT, Thickness=0.035inch, Voltage Rating=50V, Voltage Rating (DC)=50V, Weight=7.1E-05oz, Width=0.031inch
C5: library part CMP-2006-04390-1, Manufacturer="AVX Interconnect / Elco", Part Number=06035C104KAT4A
C6 C15: library part CMP-03422-000747-1, "CAP CER 100PF 50V X7R 0603", Capacitance="100 pF", Manufacturer=YAGEO, Package=CC0603-DA, Temperature="-55°C to +125°C", Temperature Characteristic=X7R, Temperature Coefficient=15%, Temperature Range High=+125°C, Temperature Range Low=-55°C, Tolerance=0.1, Voltage="50 V", Automotive=No, Category=Cap, ComponentLink2Description=Datasheet, ComponentLink2URL=http://www.yageo.com/documents/recent/UPY-GPHC_X7R_6.3V-to-50V_18.pdf, Device Class L1="Passive Components", Device Class L2=Capacitors, Device Class L3="Ceramic Capacitors", Digikey Description="CAP CER 100PF 50V X7R 0603", Footprint Url=http://www.yageo.com/exep/pages/download/literatures/UPY-C_GEN_24.pdf, Height=0.9mm, Lead Free=Yes, Manufacturer Part Number=CC0603KRX7R9BB101, Material=Ceramic, Mouser Description="Multilayer Ceramic Capacitor, CC Series, 100 pF, - 10%, X7R, 50 V, 0603 [1608 Metric]", Octopart=https://octopart.com/cc0603krx7r9bb101-yageo-42334526, RoHS=TRUE, Voltage Rating="50 V"
C7: library part CMP-2006-03238-1, Manufacturer=Kemet, Part Number=C0603C475K8PACTU
C8 C16: library part CMP-2006-04374-2, "General Purpose Ceramic Capacitor, 0603, 10nF, 10%, X7R, 15%, 50V", Capacitance=10nF, Case Code (Imperial)=0603, Case Code (Metric)=1608, Dielectric=X7R, Dielectric Material=Ceramic, Insulation Resistance=100GR, Max Operating Temperature=125°C, Min Operating Temperature=-55°C, Package Quantity=1, Tolerance=10%, Voltage=50V, Case/Package=0603, Contact Plating=Tin, Depth=0.81mm, Dissipation Factor=2.5%, Height=0.9mm, Lead Free="Lead Free", Length=1.6mm, Mount="Surface Mount", Number of Pins=2, Packaging="Tape and Reel", Radiation Hardening=No, REACH SVHC="No SVHC", Termination=SMD/SMT, Thickness=0.035inch, Voltage Rating=50V, Voltage Rating (DC)=50V, Width=0.032inch
C12 C14: library part CMP-0687-00006-1, "Aluminum Electrolytic Capacitor, UD Series, Low Impedance, 1000 uF, 10 V, + / - 20%, -55 to 105 degC, Chip Type, 10 x 10 mm D x L, Pb-Free, Reel", Manufacturer=Nichicon, Rated Capacitance="1000 uF", Rated Ripple Current (at 100kHz)="670 mA", Rated Voltage="10 V", Tolerance Rated Capacitance="-20 to 20%", ComponentLink1Description="Manufacturer URL", ComponentLink1URL=http://www.nichicon.co.jp/, ComponentLink2Description=Datasheet, ComponentLink2URL=http://products.nichicon.co.jp/en/pdf/XJA043/e-ud.pdf, ComponentLink3Description="Package Specification", ComponentLink3URL=http://products.nichicon.co.jp/en/pdf/XJA043/e-ud.pdf, DatasheetVersion=08/2012, Diameter="10 mm", Endurance Time="5000 h", Impedance="0.09 Ohm", Length="10 mm", Mounting Technology="Surface Mount", PackageDescription="2-Pin Surface Mount Device, Diameter 10 mm, Height 10 mm, Pitch 8 mm", PackageReference=CAPAE-D10H10, Packing="Dia382mm Reel", PartNumber=UUD1A102MNL1GS, RoHS=TRUE
C17 C21: library part CMP-2008-04254-2, "Chip Multilayer Ceramic Capacitors for General Purpose, 0402, 1000pF, C0G, 30ppm/°C, 5%, 50V", Capacitance=1nF, Case Code (Imperial)=0402, Case Code (Metric)=1005, Dielectric=C0G, Dielectric Material=Ceramic, Insulation Resistance=10GR, Max Operating Temperature=125°C, Min Operating Temperature=-55°C, Package Quantity=1, Temperature Coefficient=30ppm/°C, Tolerance=5%, Voltage=50V, Case/Package=0402, Depth=0.5mm, Height=0.5mm, Lead Free="Lead Free", Length=1mm, Material=Ceramic, Mount="Surface Mount", Number of Pins=2, Packaging="Tape and Reel", Radiation Hardening=No, REACH SVHC="No SVHC", Termination=SMD/SMT, Thickness=0.022inch, Voltage Rating=50V, Voltage Rating (DC)=50V, Width=0.5mm
C18 C19 C22 C23: library part CMP-2008-03929-1, Manufacturer=Murata, Part Number=GRM155R61A334KE15D
C20 C24: library part CMP-06035-004830-1, "Chip Multilayer Ceramic Capacitors for General Purpose, 0402, 330pF, C0G, 30ppm/°C, 5%, 50V", Capacitance=330pF, Case Code (Imperial)=0402, Case Code (Metric)=1005, Dielectric=C0G, Insulation Resistance=10GR, Max Operating Temperature=125°C, Min Operating Temperature=-55°C, Package Quantity=1, Temperature Coefficient=30ppm/°C, Tolerance=5%, Voltage=50V, Case/Package=0402, Depth=0.5mm, Height=0.5mm, Lead Free="Lead Free", Length=1mm, Material=Ceramic, Mount="Surface Mount", Number of Pins=2, Packaging="Tape and Reel", Radiation Hardening=No, REACH SVHC="No SVHC", Termination=SMD/SMT, Thickness=0.022inch, Voltage Rating=50V, Voltage Rating (DC)=50V, Width=0.5mm
C25 C27 C29 C31: library part CMP-13271-000002-1, "CAP CER 10UF 10V X5R 0402", Capacitance=10uF, Manufacturer=Samsung, Temperature="-55°C to +85°C", Temperature Characteristic=X5R, Temperature Coefficient=15%, Temperature Range High=+85°C, Temperature Range Low=-55°C, Tolerance=20%, Voltage Rating=10V, Automotive=No, Category=Cap, ComponentLink2Description=Datasheet, ComponentLink2URL=http://www.samsungsem.com/kr/support/product-search/mlcc/__icsFiles/afieldfile/2019/05/10/19-CL05A106MP5NUNC.pdf, Device Class L1="Passive Components", Device Class L2=Capacitors, Device Class L3="Ceramic Capacitors", Digikey Description="CAP CER 10UF 10V X5R 0402", Height=0.7mm, Ipc Land Pattern Name=CAPC10050X50, Lead Free=Yes, Manufacturer Part Number=CL05A106MP5NUNC, Material=Ceramic, Octopart=https://octopart.com/cl05a106mp5nunc-samsung-22457395, Package=CL05A106MP5NUNC, RoHS=TRUE
C26 C28 C30 C32 C35 C36 C37: library part CMP-2008-02046-2, "CAP CER 0.1UF 10V X5R 0402", Capacitance="0.10 μF", Manufacturer=Kemet, Package=C0402-BB, Temperature="-55°C to +125°C", Temperature Characteristic=X5R, Temperature Coefficient=15%, Temperature Range High=+125°C, Temperature Range Low=-55°C, Tolerance=0.1, Voltage Rating="10 V", Automotive=No, Category=Cap, ComponentLink2Description=Datasheet, ComponentLink2URL=https://content.kemet.com/datasheets/KEM_C1002_X7R_SMD.pdf, Device Class L1="Passive Components", Device Class L2=Capacitors, Device Class L3="Ceramic Capacitors", Digikey Description="CAP CER 0.1UF 10V X5R 0402", Height=0.55mm, Ipc Land Pattern Name=CAPC10050X50, Lead Free=Yes, Manufacturer Part Number=C0402C104K8PACTU, Material=Ceramic, Mouser Description="Capacitor 100 nF 10 VDC 0402", Octopart=https://octopart.com/c0402c104k8pactu-kemet-140039, RoHS=TRUE
C33 C34: library part CMP-06035-063009-1, "CAP CER 2.2UF 10V X5R 0402", Capacitance=2.2uF, Case Code (Imperial)=0402, Case Code (Metric)=1005, Dielectric=X5R, Max Operating Temperature=85°C, Min Operating Temperature=-55°C, Package Quantity=10000, Tolerance=10%, Voltage Rating=10V, Case/Package=0402, Depth=0.5mm, Height=0.5mm, Lead Free="Lead Free", Length=1mm, Material=Ceramic, Mount="Surface Mount", Packaging="Tape and Reel", REACH SVHC="No SVHC", RoHS Compliant=Yes, Termination=SMD/SMT, Thickness=0.022inch, Voltage Rating (DC)=10V, Weight=0.000212oz, Width=0.5mm
D1 D2: library part CMP-240925-000041-3, "DIODE SCHOTTKY 600V 3A TO252-2", Average Rectified Current=11A, Case/Package=TO-252, Forward Current=3A, Forward Voltage=1.7V, Max Forward Surge Current (Ifsm)=100A, Max Operating Temperature=175°C, Max Power Dissipation=53W, Max Repetitive Reverse Voltage (Vrrm)=600V, Max Reverse Current=100uA, Max Reverse Leakage Current=50uA, Min Operating Temperature=-55°C, Package Quantity=75, Element Configuration=Single, Height=2.388mm, Length=7.34mm, Max Reverse Voltage (DC)=600V, Max Surge Current=100A, Mount="Surface Mount", Number of Pins=2, Packaging=Rail/Tube, Peak Non-Repetitive Surge Current=100A, Radiation Hardening=No, Reverse Recovery Time=0ns, RoHS Compliant=Yes, Series=Z-Rec®, Termination="Through Hole", Width=7.518mm
J1: library part CMP-02766-001412-1, "CONN HEADER SMD 14POS 1.27MM", Housing Color=Black, Max Operating Temperature=125°C, Min Operating Temperature=-55°C, Contact Material=Bronze, Contact Plating=Gold, Depth=5.84mm, Gender=Male, Housing Material=Polymer, Lead Free="Lead Free", Length=8.89mm, Number Of Contacts=14, Number Of Rows=2, Orientation=Straight, Packaging=Rail/Tube, Pitch=1.27mm, Radiation Hardening=No, RoHS Compliant=Yes, Termination=Solder
J2: library part CMP-04776-000321-1, "CONN HEADER VERT 4POS 1.25MM", Case/Package=0410, Color=Natural, Contact Resistance=20mR, Current=1A, Flammability Rating="UL94 V-0", Insulation Resistance=100MR, Max Operating Temperature=85°C, Max Voltage Rating (AC)=125V, Min Operating Temperature=-40°C, Package Quantity=5000, Contact Material=Bronze, Contact Plating=Tin, Current Rating=1A, Gender=Male, Glow Wire Compliant=Non-compliant, Housing Color=Natural, Housing Material=Polyamide, Lead Free="Lead Free", Mount="Through Hole", Number of Circuits=4, Number Of Contacts=4, Number of Positions=4, Number Of Rows=1, Orientation=Vertical, Packaging=Tray, Pitch=1.25mm, Plating=Tin, Radiation Hardening=No, RoHS Compliant=Yes, Series=PicoBlade, Termination=Solder, Voltage=125V, Voltage Rating=125V, Voltage Rating (AC)=125V, Voltage Rating (DC)=125V, Working Voltage=125V
led1 LED2: library part CMP-1426-00010-4, "Led, Red, 630 Nm, 1.9 V, 30 Ma, 60 Mcd Rohs Compliant: Yes", Case Code (Imperial)=0805, Case Code (Metric)=2012, Color=Red, Forward Current=100mA, Forward Voltage=1.9V, Max Junction Temperature (Tj)=95°C, Max Operating Temperature=85°C, Max Reverse Voltage (DC)=5V, Min Operating Temperature=-40°C, Power Dissipation=72mW, Test Current=20mA, Case/Package=0805, Dominant Wavelength=630nm, Height=700µm, Length=2mm, Lens Style="Clear, Rectangular", Luminous Intensity=60mcd, Mount="Surface Mount", Packaging="Tape and Reel", Peak Wavelength=645nm, REACH SVHC=Unknown, Reverse Voltage=5V, RoHS=Compliant, Viewing Angle=140°, Wavelength=630nm, Width=1.25mm
P1 P2 P3 P4: library part CMP-1502-02329-2, Color=Black, Current Rating=10A, Max Operating Temperature=105°C, Min Operating Temperature=-40°C, Voltage Rating=300V, Connector Type="Terminal Block", Contact Gender=Male, Contact Material=Brass, Contact Plating=Tin, Gender=Male, Housing Material=Polymer, Lead Pitch=5.08mm, Length=12.96mm, Mount="Through Hole", NexarPartId=22866752, Number Of Contacts=2, Number of Pins=2, Pitch=5.08mm, REACH SVHC=Unknown, RoHS=Compliant, Termination=PCB
Q1 Q3 Q5: library part CMP-1091-00172-1, "N-Channel OptiMOS 3 Power-Transistor, 60 V VDS, 90 A ID, -55 to 175 degC, PG-TO252-3-11, Reel, Green", Manufacturer=Infineon, PartNumber="IPD035N06L3 G", ComponentLink1Description="Manufacturer URL", ComponentLink1URL=http://www.infineon.com/, ComponentLink2Description=Datasheet, ComponentLink2URL=http://www.infineon.com/dgdl/IPD035N06L3_Rev2.3.pdf?folderId=db3a304313b8b5a60113cee8763b02d7&fileId=db3a30431b3e89eb011b4558ed7f7d14, ComponentLink3Description="Package Specification", ComponentLink3URL=http://www.infineon.com/dgdl/IPD160N04L_rev1.0.pdf?folderId=db3a3043163797a6011643468e7505a4&fileId=db3a3043163797a60116436401cf05cf, DatasheetVersion="Rev. 2.3", Green=TRUE, Halogen-free=TRUE, ID (max)="90Â A", IDpuls (max)="360Â A", Mounting Technology="Surface Mount", PackageDescription="3-Pin Plastic (Green) Transistor Single Outline Package, 6.57 x 6.1 mm Body, 2.29 mm Pitch", PackageReference=PG-TO252-3-11, PackageVersion="Rev. 02, 03/2007", Packing=Reel, Polarity=N, Ptot (max)="167Â W", QG="59Â nC", RDS (on) (max)="3.5Â mOhm", RDS (on) (max) (@4.5V)="5.5Â mOhm", Rth="0.9Â K/W", RthJA (max)="62 K/W", RthJC (max)="0.9Â K/W", VDS (max)="60Â V", VGS(th) (max)="2.2Â V", VGS(th) (min)="1.2Â V"
Q2 Q4: library part CMP-32901-000143-1, "MOSFET N-CH 30V 161A DPAK", Continuous Drain Current=161A, Drain To Source Breakdown Voltage=30V, Drain To Source Resistance=3.2mΩ, Gate To Source Voltage=20V, Input Capacitace At Vds="4380pF @ 15V", Manufacturer=Infineon, Manufacturer Part Number=IRLR7843TRPBF, Max Forward Diode Voltage=1V, Max Junction Temp=+175°C, Package=PG-TO252-3, Power Dissipation=140W, Pulse Drain Current=620A, Temperature="-55°C to +175°C", Temperature Range Low=-55°C, Automotive=No, Category=Trans, ComponentLink2Description=Datasheet, ComponentLink2URL=https://www.infineon.com/dgdl/irlr7843pbf.pdf?fileId=5546d462533600a40153566de53526d8, Depletion Mode=False, Device Class L1="Discrete Semiconductors", Device Class L2=Transistors, Device Class L3=MOSFETs, Digikey Description="MOSFET N-CH 30V 161A DPAK", Drain To Source Voltage=30V, Footprint Url=https://www.infineon.com/cms/en/product/packages/PG-TO252/PG-TO252-3-901/, Gate Charge At Vgs="34nC @ 4.5V", Height=2.52mm, Lead Free=Yes, Number Of Channels=1, Number Of N Channels=1, Octopart=https://octopart.com/irlr7843trpbf-infineon-65875062, Reverse Recovery Charge=36nC, Reverse Recovery Time=39ns, RoHS=TRUE, Rthja Max=50°C/W, Temperature Range High=+175°C, Threshold Vgs Max=2.3V, Threshold Vgs Min=1.4V, Turn Off Delay Time=34ns, Turn On Delay Time=25ns
Q6: library part CMP-1258-00163-1, "N-Channel uTrenchMOS(TM) Extremely Low Level FET, 20 V, 3.76 A, 3-Pin SOT23, Tape and Reel", Manufacturer="NXP Semiconductors", Channel Type=N, Ciss [typ] (pF)=230, Code_JEDEC=TO-236AB, ComponentLink1Description="Manufacturer URL", ComponentLink1URL=http://www.nxp.com/, ComponentLink2Description=Datasheet, ComponentLink2URL=http://www.nxp.com/documents/data_sheet/PMV56XN.pdf, ComponentLink3Description="Package Specification", ComponentLink3URL=http://www.nxp.com/documents/outline_drawing/sot023_po.pdf, Coss [typ] (pF)=125, DatasheetVersion="Rev. 02", ID [max] (A)=3.76, Mounting Technology="Surface Mount", PackageDescription="3-Pin Small Outline Transistor Package, Body 2.9 x 1.3 mm, Pitch 0.95 mm", PackageReference=SOT23, PackageVersion="06-03-16, 03/2006", Packing="Tape & Reel", PartNumber=PMV56XN,215, VDS [max] (V)=20
R1 R13: library part CMP-2000-03383-1, Manufacturer="Vishay Dale", Part Number=CRCW060347R0FKEA
R2 R7 R50 R51: library part CMP-1659-00049-1, "Chip Resistor, 470 KOhm, +/- 1%, 0.1 W, -55 to 155 degC, 0603 (1608 Metric), RoHS, Tape and Reel", ComponentLink1Description="Manufacturer URL", ComponentLink1URL=http://www.yageo.com/, ComponentLink2Description=Datasheet, ComponentLink2URL=http://www.yageo.com/documents/recent/PYu-RC_Group_51_RoHS_L_04.pdf, DatasheetVersion="Rev. 4, 02/2016", PackageDescription="2-Pin Surface Mount Device, Body 1.6 x 0.8 mm", PackageReference=0603
R3 R10: library part CMP-2000-00225-1, Manufacturer=Panasonic, Part Number=ERJ-3EKF1243V
R4 R11: library part CMP-2000-06943-1, "Chip Resistor, 56 KOhm, +/- 1%, 0.1 W, -55 to 155 degC, 0603 (1608 Metric), RoHS, Tape and Reel", Case Code - in=0603, Case Code - mm=1608, Manufacturer=Yageo, Operating Temperature Range=-55Cto+155C, Package / Case=0603(1608metric), Package Description="2-Pin Surface Mount Device, Body 1.6 x 0.8 mm", Power Rating=100mW, Resistance=56kOhms, Temperature Coefficient=100PPM/C, Tolerance=1%, Voltage Rating=75V, Brand=Yageo, Datasheet URL=http://www.yageo.com/documents/recent/PYu-RC_Group_51_RoHS_L_7.pdf, Datasheet Version="Rev. 7, 05/2017", Height=0.45mm, Length=1.6mm, Manufacturer URL=http://www.yageo.com/, Mounting Technology=SurfaceMount, Package Reference=0603, Packaging=Reel, Product=ThickFilmResistorsGeneralPurpose, Product Category=ThickFilmResistors, RoHS=True, Series=RC, Termination Style=SMD/SMT, Type=GeneralPurposeChipResistorSurfaceMount, Unit Weight=0.000071oz, Width=0.8mm
R5 R12: library part CMP-1659-00009-5, "RES 1K OHM 1% 1/10W 0603", Case Code (Imperial)=0603, Case Code (Metric)=1608, Max Operating Temperature=155°C, Max Power Dissipation=100mW, Min Operating Temperature=-55°C, Resistance=1kR, Resistance Tolerance=1%, Resistor Type="Thick Film", Temperature Coefficient=100ppm/°C, Voltage Rating=50V, Case/Package=0603, Construction=Rectangular, Contact Plating=Tin, Depth=0.8mm, Features="Moisture Resistant", Height=0.45mm, Lead Free="Lead Free", Length=1.6mm, Military Standard=Not, Number of Terminations=2, Packaging="Tape and Reel", Power Rating=100mW, Radiation Hardening=No, REACH SVHC="No SVHC", RoHS Compliant=Yes, Series=RC, Size Code=0603, Technology="THICK FILM", Termination=SMD/SMT, Tolerance=1%
R6 R15: library part CMP-07231-006693-1, "RES 0.02 OHM 1% 3W 2512"
R8 R14: library part CMP-1659-00024-2, "Chip Resistor, 120 KOhm, +/- 1%, 100 mW, -55 to 155 degC, 0603 (1608 Metric), RoHS, Tape and Reel", Capacitance="22 pF", Case\Package=Radial, Max Operating Temperature="125 degC", Min Operating Temperature="-55 degC", Package Quantity=500, Tolerance=10%, Type (Capacitors)=C0G, Voltage Rating="100 V", ComponentLink1Description="Manufacturer URL", ComponentLink1URL=http://www.yageo.com/, ComponentLink2Description=Datasheet, ComponentLink2URL=http://www.yageo.com/documents/recent/PYu-RC_Group_51_RoHS_L_04.pdf, DatasheetVersion="Rev. 4, 02/2016", Height="2.54 mm", Lead Pitch="2.54 mm", Length="5.33 mm", Mount="Through Hole", PackageDescription="2-Pin Surface Mount Device, Body 1.6 x 0.8 mm", PackageReference=0603, Packaging=Bulk, Radiation Hardening=No, RoHSCompliant=true, Voltage Rating (DC)="100 V", Width="3.81 mm"
R9 R16: library part CMP-2100-03664-2, "RES 10K OHM 1% 1/10W 0603", Case Code (Imperial)=0603, Case Code (Metric)=1608, Max Operating Temperature=155°C, Max Power Dissipation=100mW, Min Operating Temperature=-55°C, Resistance=10kR, Resistance Tolerance=1%, Resistor Type="Thick Film", Temperature Coefficient=100ppm/°C, Voltage Rating=75V, Voltage Rating (DC)=50V, Case/Package=0603, Construction=Rectangular, Depth=0.8mm, Features="Moisture Resistant", Height=0.45mm, Lead Free="Lead Free", Lead Pitch=0.3mm, Length=1.6mm, Military Standard=Not, Number of Pins=2, Number of Terminations=2, Packaging="Tape and Reel", Power Rating=100mW, RoHS Compliant=Yes, Series=RC, Size Code=0603, Termination=SMD/SMT, Tolerance=1%, Weight=7.1E-05oz, Width=0.8mm
R17 R23: library part CMP-2002-07031-1, Manufacturer="Yageo / Phycomp", Part Number=RC0402FR-07560KL
R18 R19 R20 R24 R25 R26: library part CMP-2002-07517-1, Manufacturer="Yageo / Phycomp", Part Number=RC0402FR-0722KL
R21 R27: library part CMP-2002-07061-1, Manufacturer="Yageo / Phycomp", Part Number=RC0402FR-072M2L
R22 R28: library part CMP-2002-07106-1, Manufacturer="Yageo / Phycomp", Part Number=RC0402FR-071M5L
R29 R30 R31 R34 R37: library part CMP-2002-07353-1, Manufacturer="Yageo / Phycomp", Part Number=RC0402FR-0710KL
R32 R33: library part CMP-2002-07727-1, Manufacturer="Yageo / Phycomp", Part Number=RC0402FR-07510RL
R35 R36: library part CMP-1011-00001-2, Manufacturer="Yageo / Phycomp", Part Number=RC0402JR-070RL
R38 R39: library part CMP-2002-08011-2, Case Code (Imperial)=0402, Max Operating Temperature=155°C, Max Power Dissipation=63mW, Min Operating Temperature=-55°C, Resistance=4.7kΩ, Temperature Coefficient=100ppm/°C, Tolerance=5%, Voltage Rating=50V, Case/Package=0402, Composition="Thick Film", Depth=500µm, Features="Moisture Resistant", Height=350µm, Lead Free="Lead Free", Length=1mm, Military Standard=Not, Number of Pins=2, Number of Terminations=2, Packaging="Tape & Reel", Power Rating=63mW, REACH SVHC="No SVHC", RoHS=Compliant, Schedule B="8533210045, 8533210045", Termination=SMD/SMT, Voltage Rating (AC)=50V, Voltage Rating (DC)=50V, Width=500µm
T1 T2: "Transformer", Manufacturer_Name=MYRRA, Datasheet Link=https://www.tme.com/Document/74b1c6fdfa5c80edd28be424718b4d1b/74080.pdf, Height=18mm, Manufacturer_Part_Number=74080
U1 U3: library part CMP-09139-000585-1, "IC REG CTRLR MULT TOPOLOGY 10DFN", Case/Package=DFN, Max Frequency=1MHz, Max Input Voltage=100V, Max Operating Temperature=125°C, Max Output current=1.2A, Max Output Voltage=12V, Min Input Voltage=5.5V, Min Operating Temperature=-40°C, Package Quantity=121, Height=0.7mm, Length=3mm, Max Supply Voltage=100V, Min Supply Voltage=5.5V, Mount="Surface Mount", Number of Outputs=1, Number of Pins=10, Output Voltage=100V, Packaging=Rail/Tube, REACH SVHC="No SVHC", RoHS Compliant=Yes, Series=-, Switching Frequency=1MHz, Topology=Boost, Width=3mm
U2: library part CMP-09133-000023-1, "IC GATE DRVR LOW-SIDE 8MINISOIC", Case/Package=MSOP, Max Input Voltage=18V, Max Operating Temperature=125°C, Max Output current=4A, Max Supply Current=3mA, Min Input Voltage=4.5V, Min Operating Temperature=-40°C, Package Quantity=3000, Channel Type=Independent, Fall Time=25ns, Lead Free="Contains Lead", Max Supply Voltage=18V, Min Supply Voltage=4.5V, Mount="Surface Mount", Nominal Supply Current=3mA, Number of Drivers=2, Number of Outputs=2, Number of Pins=8, Output Current=4A, Packaging="Tape and Reel", Propagation Delay=35ns, Rise Time=14ns, RoHS Compliant=Yes, Series=-, Supply Current=3mA, Turn-On Delay Time=35ns
U4 U5: library part CMP-0384-01796-1, "Double Channel Wide Bandwidth Operational Amplifier, 8.4 MHz BW, 6 V/us SR, Industrial, 8-pin SOP (RM-8), Reel", Amplifiers Per Package=2, Generic Part Number=AD8602, Input Bias Current=200fA, Input Offset Voltage=500uV, Manufacturer="Analog Devices", Automotive Qualified=Yes, Code_JEDEC=MO-187-AA, ComponentLink1Description="Manufacturer URL", ComponentLink1URL=http://www.analog.com/en/index.html, ComponentLink2Description=Datasheet, ComponentLink2URL=http://www.analog.com/static/imported-files/data_sheets/AD8601_8602_8604.pdf, ComponentLink3Description="Package Specification", ComponentLink3URL=http://www.analog.com/static/imported-files/packages/PKG_PDF/MSOP%28RM%29/RM_8.pdf, DatasheetVersion="Rev. G", Iq/Amp=1.2mA, Mounting Technology="Surface Mount", PackageDescription="8-Pin Mini Small Outline Package, Body 3 x 3 mm, Pitch 0.65 mm", PackageReference=RM-8, PartNumber=AD8602DRM-REEL, Slew Rate=6V/us, Small Signal Bandwidth=8.4MHz, V Span Max=6V, V Span Min=2.7V
U7: library part CMP-209535-000001-1, "LDO Voltage Regulators 1A, 3.3V", Dropout Voltage=1.1V, Manufacturer="Advanced Monolithic Systems", Max Junction Temp=+125°C, Max Power Dissipation=1.2W, Max Supply Voltage=15V, Nominal Supply Current=5mA, Output Current=1A, Output Voltage=3.3V, Package=AMS1117, Temperature="-40°C to +125°C", Temperature Range Low=-40°C, Automotive=No, Category=IC, ComponentLink2Description=Datasheet, ComponentLink2URL=http://www.advanced-monolithic.com/pdf/ds1117.pdf, Device Class L1="Integrated Circuits (ICs)", Device Class L2="Power Management ICs", Device Class L3="Voltage Regulators - Linear", Height=1.8mm, Ipc Land Pattern Name=SOT229P700X180-4, Lead Free=Yes, Manufacturer Part Number=AMS1117-3.3, Number of Outputs=1, Octopart=https://octopart.com/ams1117-3.3-advanced+monolithic+systems-25899300, Output Type=Fixed, RoHS=TRUE, Standoff Height=0.64mm, Temperature Range High=+125°C
U8: library part CMP-12105-000017-1, "IC MCU 32BIT 128KB FLASH 100LQFP", Ambient Temperature Range High=+85°C, Ambient Temperature Range Low=-40°C, Frequency=480MHz, Manufacturer=STMicroelectronics, Max Junction Temp=+125°C, Max Supply Voltage=3.6V, Min Supply Voltage=1.62V, Package=LQFP100-1L, Temperature="-40°C to +125°C", Automotive=No, Category=IC, ComponentLink2Description=Datasheet, ComponentLink2URL=https://www.st.com/resource/en/datasheet/stm32h750vb.pdf, Core Architecture="ARM Cortex-M7", Data Bus Width=32bits, Device Class L1="Integrated Circuits (ICs)", Device Class L2="Embedded Processors and Controllers", Device Class L3=Microcontrollers, Digikey Description="IC MCU 32BIT 128KB FLASH 100LQFP", Height=1.6mm, Interface=I2C,SPI,UART,USART,CAN,USB,LIN,IrDA,Ethernet,I2S,Other, Lead Free=Yes, Manufacturer Part Number=STM32H750VBT6, Memory Size=128KBytes, Memory Type=FLASH, Mouser Description="MCU 32-Bit STM32H750VB ARM Cortex M7 RISC 128KB Flash 1.8V/2.5V/3.3V 100-Pin LQFP Tray", Number Of A/D Converters=3, Number Of Adc Channels=36, Number Of Cores=1, Number Of Ethernet Channels=1, Number Of I2C Channels=4, Number Of I/Os=82, Number Of Pwm Channels=42, Number Of Spi Channels=6, Number Of Timers/Counters=20, Number Of Uart Channels=9, Number Of Usb Channels=2, Octopart=https://octopart.com/stm32h750vbt6-stmicroelectronics-94048547, Ram Size=1MBytes, RoHS=TRUE, Standoff Height=0.05mm, Temperature Range High=+125°C, Temperature Range Low=-40°C
U9: library part CMP-0384-01443-3, "Single Channel RRIO Operational Amplifier, 80 MHz BW, 35 V/us SR, Industrial, 5-pin SOT23 (RJ-5), Reel", Amplifiers Per Package=1, Generic Part Number=AD8031, Input Bias Current=450nA, Input Offset Voltage=1mV, Manufacturer="Analog Devices", Code_JEDEC=MO-178-AA, ComponentLink1Description="Manufacturer URL", ComponentLink1URL=http://www.analog.com/en/index.html, ComponentLink2Description=Datasheet, ComponentLink2URL=http://www.analog.com/static/imported-files/data_sheets/AD8031_8032.pdf, ComponentLink3Description="Package Specification", ComponentLink3URL=http://www.analog.com/static/imported-files/packages/PKG_PDF/SOT-23(RJ)/RJ_5.pdf, ComponentLink4Description="Reference Circuit", ComponentLink4URL=http://www.analog.com/en/all-operational-amplifiers-op-amps/operational-amplifiers-op-amps/ad8031/products/product.html#product-recommendations, DatasheetVersion="Rev. D", Iq/Amp=900uA, Mounting Technology="Surface Mount", PackageDescription="5-Pin Small Outline Transistor Package, Body 2.9 x 1.6 mm, Pitch 0.95 mm", PackageReference=RJ-5, PackageVersion=121608-A, Packing=Reel, PartNumber=AD8031ARTZ-REEL7, RevisionNote="Reference Circuit URL fixed", Slew Rate=35V/us, Small Signal Bandwidth=80MHz, V Span Max=12V, V Span Min=2.7V

## Free pads (board coordinates)
  round 2.9 hole 3 unplated: 4(35,35.879) 4(35,115) 4(96,35.879) 4(96,115)

## Via types
v1: diameter 1.27, hole 0.711, Signal Top to Signal Bottom, 45 vias
v2: diameter 0.8, hole 0.4, Signal Top to Signal Bottom, 36 vias
v3: diameter 0.5, hole 0.3, Signal Top to Signal Bottom, 25 vias
v4: diameter 0.6, hole 0.3, Signal Top to Signal Bottom, 22 vias
v5: diameter 0.8, hole 0.5, Signal Top to Signal Bottom, 9 vias
v6: diameter 0.7, hole 0.35, Signal Top to Signal Bottom, 2 vias

## Nets (pads, with @x,y where several pads share a name; then routed paths per layer and width w, separated by ;. In a path a pad name is that pad's centre, name@x,y a point inside that pad or via, vN(x,y) a via of type N, cw(c..) or ccw(c..) an arc to the next point about the centre after c; other vN are vias at no path point)
+3V3: C31.1 C32.1 C35.1 C36.1 C37.1 J1.3 J2.1 R30.1 R35.1 R36.1 R38.2 R39.2 U4.8 U5.8 U7.2 U7.4 U8.11 U8.21 U8.27 U8.50 U8.75 U8.100 U9.5 | length 182.5
  Power w0.254: v4(40.386,58.547) 60.325,58.547 v4(62.865,56.007) 70.485,56.007 ; v1(62.103,40.894) 72.136,40.894 v1(73.025,40.005) 83.566,40.005 v1(87.63,44.069) ; v1(72.263,61.468) 72.263,57.785 70.485,56.007 ; v4(85.217,60.833) 85.283,60.767 85.986,60.767 v4(88.046,58.707) ; v2(97.381,39.777) 94.867,42.291 89.408,42.291 v1(87.63,44.069) ; 70.485,56.007 82.349,44.143 ccw(c82.528,44.323) 82.528,44.069 v1(87.63,44.069)
  Power w0.5: 83.566,40.005 83.566,39.564 J2.1@83.82,39.31
  Power w0.54: v1(81.407,54.102) 84.709,54.102 87.63,51.181 v1(87.63,44.069)